# EAGLE board M_3x4._v4.2 (EAGLE 9.6.2)
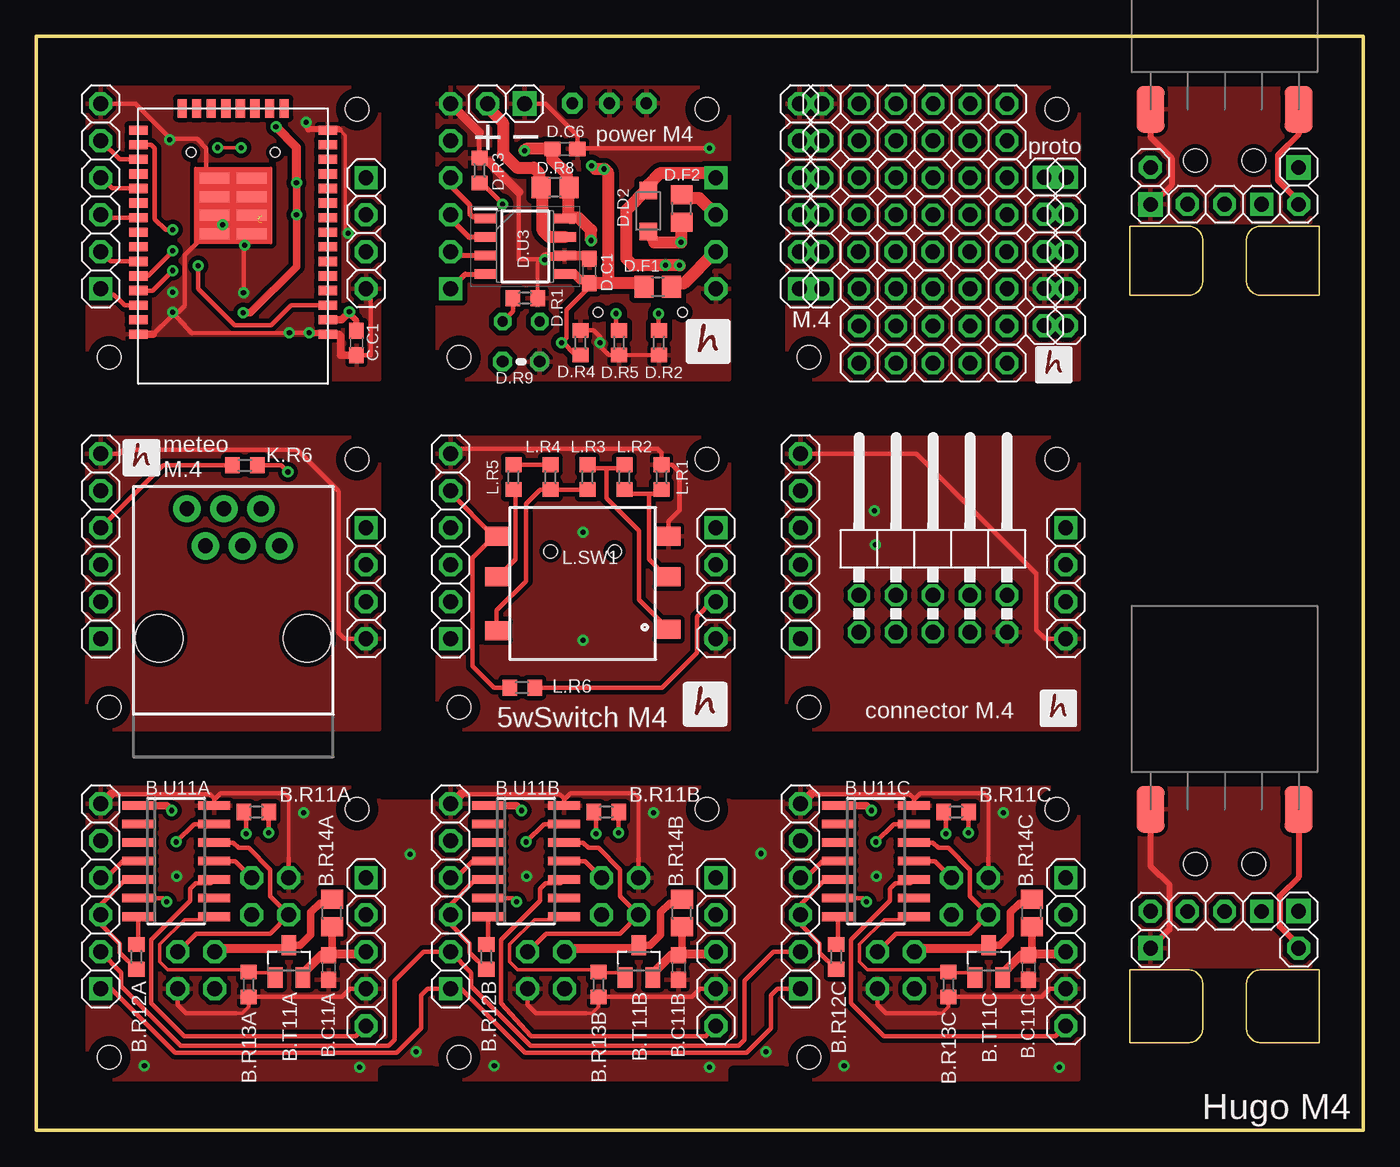
[diagram p0: board, top side]
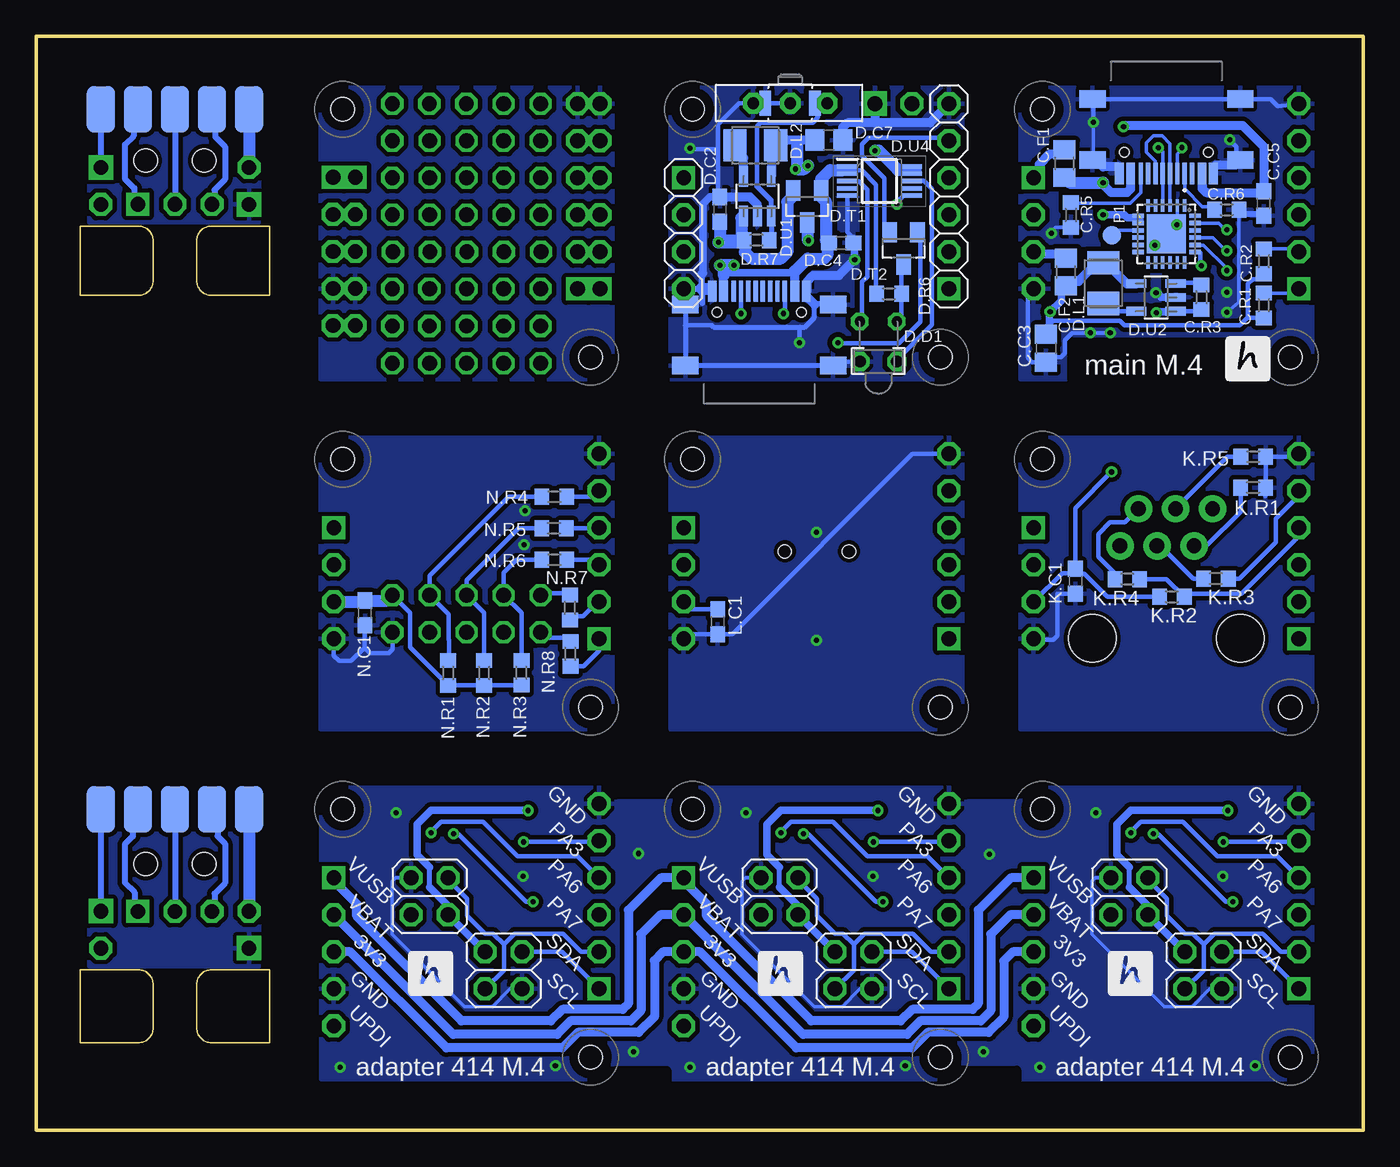
[diagram p1: board, bottom side, seen from below]

Size 91 x 75 mm. Coordinates in mm from the lower left corner, seen from the top.
Outline: 0,0 91,0 91,75 0,75 0,0
Copper layers (1*16): Top 0.035mm / dielectric 1.5mm / Bottom 0.035mm
Design rules "default *": minimum track width 10mil, minimum drill 0.35mm, track to track 6mil, track to pad 6mil, pad to pad 6mil, via to via 6mil, smd to smd 6mil, copper to edge 0mil, drill to drill 15mil, minimum pad ring 10mil, minimum via ring 8mil, stop-mask expansion 4mil, vias tented up to drill 0mil, thermal gap 10mil
Holes 1.6 mm at 29,53 46,70 70,70 53,53 22,46 5,29 5,5 22,22 29,5 46,22 53,5 70,22 29,29 46,46 79.5,66.5 83.5,66.5 70,46 53,29 79.5,18.25 83.5,18.25 5,53 22,70
tRestrict: area 45,69 to 47,71; area 28,52 to 30,54; area 69,69 to 71,71; area 52,52 to 54,54; area 21,45 to 23,47; area 4,28 to 6,30; area 21,21 to 23,23; area 4,4 to 6,6; area 45,21 to 47,23; area 28,4 to 30,6; area 69,21 to 71,23; area 52,4 to 54,6; 10 more areas
bRestrict: area 28,52 to 30,54; area 45,69 to 47,71; area 52,52 to 54,54; area 69,69 to 71,71; area 4,28 to 6,30; area 21,45 to 23,47; area 21,21 to 23,23; area 4,4 to 6,6; area 45,21 to 47,23; area 28,4 to 30,6; area 69,21 to 71,23; area 52,4 to 54,6; 10 more areas
Milling: 24 lines

## Footprints (pad centres in the part's own frame; a part is rotated, then mirrored left to right if it is on the bottom)
C0603 = smd 1.1 x 1: 1 -0.85,0; 2 0.85,0
1X06 = drill 1.016 pad 1.575 square: 1 -6.35,0 | drill 1.016 pad 1.575 octagon: 2 -3.81,0; 3 -1.27,0; 4 1.27,0; 5 3.81,0; 6 6.35,0
2X02 = drill 1.016 pad 1.575 octagon: 1 -1.27,-1.27; 2 -1.27,1.27; 3 1.27,-1.27; 4 1.27,1.27
1X05 = drill 1.016 pad 1.575 square: 1 -5.08,0 | drill 1.016 pad 1.575 octagon: 2 -2.54,0; 3 0,0; 4 2.54,0; 5 5.08,0
R0603 = smd 1 x 1.1: 1 -0.85,0; 2 0.85,0
FUSE = smd 1.3 x 1.5: 1 -0.95,0; 2 0.95,0
SO23 = smd 1 x 1.4: D 0,1.1; G -0.95,-1.1; S 0.95,-1.1
SO14 = smd 0.6 x 2.2: 1 -3.81,-2.6; 2 -2.54,-2.6; 3 -1.27,-2.6; 4 0,-2.6; 5 1.27,-2.6; 6 2.54,-2.6; 7 3.81,-2.6; 8 3.81,2.6; 9 2.54,2.6; 10 1.27,2.6; 11 0,2.6; 12 -1.27,2.6; 13 -2.54,2.6; 14 -3.81,2.6
C0805 = smd 1.3 x 1.5: 1 -0.95,0; 2 0.95,0
R0805 = smd 1.3 x 1.5: 1 -0.95,0; 2 0.95,0
TTGO-MICRO-32 = smd 1.27 x 0.635: 3V3 -6.5,5; EN -6.5,4; GND1 -6.5,6; GND2 -6.5,-8; GND3 6.5,6; IO0 6.5,-7; IO2 6.5,-8; IO4 6.5,-6; IO5 6.5,-3; IO12 -6.5,-7; IO14 -6.5,-6; IO16 6.5,-5; IO17 6.5,-4; IO18 6.5,-2; IO19 6.5,-1; IO21 6.5,1; IO22 6.5,4; IO23 6.5,5; IO25 -6.5,-3; IO26 -6.5,-4; IO27 -6.5,-5; IO32 -6.5,-1; IO33 -6.5,-2; IO34 -6.5,1; IO35 -6.5,0; NC 6.5,0; RXD0 6.5,2; TXD0 6.5,3; VN -6.5,2; VP -6.5,3 | smd 0.635 x 1.27: CLK 0.5,-9.5; CMD -0.5,-9.5; IO13 -3.5,-9.5; IO15 3.5,-9.5; SD0 1.5,-9.5; SD1 2.5,-9.5; SD2 -2.5,-9.5; SD3 -1.5,-9.5 | smd 2.032 x 0.762: GND4 -1.27,-0.889; GND5 1.27,-0.889; GND6 -1.27,-2.159; GND7 1.27,-2.159; GND8 -1.27,-3.429; GND9 -1.27,-4.699; GND10 1.27,-3.429; GND11 1.27,-4.699
LED_1.8 = drill 0.7 octagon: 1 -1.27,-0.4; 2 1.27,-0.4
SHOTKY_2.8 = smd 1.2 x 1.2: A -1.4,0; K 1.4,0
1X04 = drill 1.016 pad 1.575 square: 1 -3.81,0 | drill 1.016 pad 1.575 octagon: 2 -1.27,0; 3 1.27,0; 4 3.81,0
L3230M = smd 1.6 x 2.2: 1 -1.4,0; 2 1.4,0
1X02 = drill 1.016 pad 1.676 square: 1 -1.27,0 | drill 1.016 pad 1.575 octagon: 2 1.27,0
SWITCH = drill 0.8 pad 1.422 octagon: P$1 -2.54,0; P$2 0,0; P$3 2.54,0 | smd 0.8 x 1.7: P$4 -1.7,0; P$5 1.7,0
THERM = drill 0.813 octagon: 1 -1.27,0; 2 1.27,0
SOT32-5 = smd 0.6 x 1.4: BP 0.95,1.35; GND 0,-1.35; SHDN 0.95,-1.35; VIN -0.95,-1.35; VOUT -0.95,1.35
SOIC127P600X175-8N = smd 1.528 x 0.65: 1 -2.711,1.905; 2 -2.711,0.635; 3 -2.711,-0.635; 4 -2.711,-1.905; 5 2.711,-1.905; 6 2.711,-0.635; 7 2.711,0.635; 8 2.711,1.905
SOP50P490X110-10N = smd 1.4 x 0.3: 1 -2.2,1; 2 -2.2,0.5; 3 -2.2,0; 4 -2.2,-0.5; 5 -2.2,-1; 6 2.2,-1; 7 2.2,-0.5; 8 2.2,0; 9 2.2,0.5; 10 2.2,1
RJ11-6 = drill 1.016 pad 1.88: 1 -3.175,8.89; 2 -1.905,6.35; 3 -0.635,8.89; 4 0.635,6.35; 5 1.905,8.89; 6 3.175,6.35 | hole 3.251: -5.08,0; 5.08,0
1X03 = drill 1.016 pad 1.575 square: 1 -2.54,0 | drill 1.016 pad 1.575 octagon: 2 0,0; 3 2.54,0
2X05/90 = drill 1.016 octagon: 1 -5.08,-6.35; 2 -5.08,-3.81; 3 -2.54,-6.35; 4 -2.54,-3.81; 5 0,-6.35; 6 0,-3.81; 7 2.54,-6.35; 8 2.54,-3.81; 9 5.08,-6.35; 10 5.08,-3.81
5_WAY_SWITCH = smd 1.6 x 1.3: 1 -6,3; 2 -6,0.2; 3 -6,-3.5; 4 5.8,3; 5 5.8,0.2; 6 5.8,-3.4 | hole 0.9: 2.1,1.95; -2.3,1.95
B1,27 = smd 1.27 x 1.27: TP 0,0
QFN50P400X400X80-25N = smd 0.81 x 0.26: 1 -1.955,1.25; 2 -1.955,0.75; 3 -1.955,0.25; 4 -1.955,-0.25; 5 -1.955,-0.75; 6 -1.955,-1.25; 13 1.955,-1.25; 14 1.955,-0.75; 15 1.955,-0.25; 16 1.955,0.25; 17 1.955,0.75; 18 1.955,1.25 | smd 0.26 x 0.81: 7 -1.25,-1.955; 8 -0.75,-1.955; 9 -0.25,-1.955; 10 0.25,-1.955; 11 0.75,-1.955; 12 1.25,-1.955; 19 1.25,1.955; 20 0.75,1.955; 21 0.25,1.955; 22 -0.25,1.955; 23 -0.75,1.955; 24 -1.25,1.955 | smd 2.68 x 2.68: 25 0,0
USB-C = smd 0.6 x 1.45: A1B12 -3.235,3.825; A4B9 -2.46,3.825; B1A12 3.215,3.825; B4A9 2.44,3.825 | smd 0.3 x 1.45: A5 -1.26,3.825; A6 -0.26,3.825; A7 0.24,3.825; A8 1.24,3.825; B5 1.74,3.825; B6 0.74,3.825; B7 -0.76,3.825; B8 -1.76,3.825 | smd 1.8 x 1.2: SH1 -5.08,2.91; SH2 -5.08,-1.27; SH3 5.06,-1.27; SH4 5.06,2.91 | hole 0.65: 2.88,2.38; -2.9,2.38
1X5_AUTO = drill 1.016 octagon: 1 -5.08,0; 2 -2.54,0; 3 0,0; 4 2.54,0; 5 5.08,0
7PIN_CONNECTOR = smd 3.175 x 1.905: 1 0,5.08; 7 0,-5.08 | smd 3.175 x 1.905 bottom: 2 0,5.08; 3 0,2.54; 4 0,0; 5 0,-2.54; 6 0,-5.08

## Placement (x,y rotation side)
B.C11A  100n  [C0603]  20.04,11.15 270 top
B.C11B  100n  [C0603]  44.04,11.15 270 top
B.C11C  100n  [C0603]  68.04,11.15 270 top
B.J1  [1X06]  28.4,16.04 90 top
B.J2  [2X02]  34.96,10.96 270 bottom
B.J3  [2X02]  40.04,16.04 270 bottom
B.J4  [1X05]  46.6,12.23 270 top
B.J5  [1X06]  52.4,16.04 90 top
B.J6  [2X02]  58.96,10.96 270 bottom
B.J7  [2X02]  64.04,16.04 270 bottom
B.J8  [1X05]  70.6,12.23 270 top
B.J11  [1X05]  22.6,12.23 270 top
B.J12  [1X06]  4.4,16.04 90 top
B.J13  [2X02]  10.96,10.96 270 bottom
B.J14  [2X02]  16.04,16.04 270 bottom
B.R11A  alt RX 0R  [R0603]  15.09,21.82 180 top
B.R11B  alt RX 0R  [R0603]  39.09,21.82 180 top
B.R11C  alt RX 0R  [R0603]  63.09,21.82 180 top
B.R12A  alt TX 0R  [R0603]  6.86,11.89 90 top
B.R12B  alt TX 0R  [R0603]  30.86,11.89 90 top
B.R12C  alt TX 0R  [R0603]  54.86,11.89 90 top
B.R13A  100k  [R0603]  14.56,9.98 270 top
B.R13B  100k  [R0603]  38.56,9.98 270 top
B.R13C  100k  [R0603]  62.56,9.98 270 top
B.R14A  alt fuse or 0R  [FUSE]  20.27,14.9 90 top
B.R14B  alt fuse or 0R  [FUSE]  44.27,14.9 90 top
B.R14C  alt fuse or 0R  [FUSE]  68.27,14.9 90 top
B.T11A  NX3008  [SO23]  17.33,11.59 0 top
B.T11B  NX3008  [SO23]  41.33,11.59 0 top
B.T11C  NX3008  [SO23]  65.33,11.59 0 top
B.U11A  AT414  [SO14]  9.59,18.45 270 top
B.U11B  AT414  [SO14]  33.59,18.45 270 top
B.U11C  AT414  [SO14]  57.59,18.45 270 top
C.C1  100n  [C0603]  21.96,53.98 270 top
C.C3  22u  [C0805]  21.75,53.62 270 bottom
C.C5  1u  [C0603]  6.81,63.55 90 bottom
C.F1  0.5A  [R0805]  20.48,66.28 90 bottom
C.F2  0.5A  [R0805]  20.38,58.85 90 bottom
C.J2  [1X06]  4.4,64.04 90 top
C.R1  2k2  [R0603]  6.81,56.56 270 bottom
C.R2  2k2  [R0603]  6.81,59.58 270 bottom
C.R3  100k  [R0603]  11.08,57.12 270 bottom
C.R5  5K1  [R0603]  20.03,62.76 90 bottom
C.R6  5k1  [R0603]  9.35,63.11 180 bottom
C.U1  TTGO-MICRO-32  [TTGO-MICRO-32]  13.49,60.58 180 top
D.C1  100n  [C0603]  37.92,58.92 270 top
D.C2  4u7  [C0603]  44.12,63.14 270 bottom
D.C4  4u7  [C0603]  35.8,60.85 180 bottom
D.C6  4u7  [C0603]  36.25,67.29 180 top
D.C7  10u  [C0805]  36.64,67.9 180 bottom
D.D1  LED_1.8_FLIPPED  [LED_1.8]  33.25,55.05 180 bottom
D.D2  SHOTKY_2.8  [SHOTKY_2.8]  41.96,63.04 270 top
D.F1  0.5A  [R0805]  42.61,57.85 0 top
D.F2  1.1A  [R0805]  44.26,63.2 90 top
D.J2  [1X06]  28.4,64.04 90 bottom
D.J3  [1X04]  46.6,61.5 270 bottom
D.L1  2u2  [L3230M]  17.83,58.09 90 bottom
D.L2  2u2  [L3230M]  41.68,67.54 0 bottom
D.LIPOL  [1X02]  32.21,70.39 180 top
D.ON/OFF/RESET  SWITCH  [SWITCH]  39.3,70.42 0 bottom
D.R1  4k7  [R0603]  33.53,57.05 180 top
D.R2  5k1  [R0603]  42.7,54 270 top
D.R3  I=1/R (4k7 for 213mA, 2k2 for455mA )  [R0603]  30.4,65.81 270 top
D.R4  100k  [R0603]  37.31,54 90 top
D.R5  5k1  [R0603]  39.96,54 270 top
D.R6  3k3  [R0603]  32.51,57.35 180 bottom
D.R7  390k  [R0603]  41.6,61.03 0 bottom
D.R8  0.1  [R0805]  35.58,64.64 180 top
D.R9  TERM_10K  [THERM]  33.25,52.71 180 top
D.T1  FDV304  [SO23]  38.13,63.34 180 bottom
D.T2  NX3008  [SO23]  31.52,60.47 180 bottom
D.U1  LM3671_3.3  [SOT32-5]  41.54,64.05 0 bottom
D.U2  LM3671_3.3  [SOT32-5]  14.2,57.11 90 bottom
D.U3  INA219AIDR  [SOIC127P600X175-8N]  33.53,60.6 0 top
D.U4  MCP73833-AMI_UN  [SOP50P490X110-10N]  33.17,65.09 0 bottom
G.J1  [1X06]  28.4,40.04 90 top
G.J2  [1X04]  46.6,37.5 270 top
I.J1  [1X04]  70.6,37.5 270 top
I.J3  [1X04]  22.6,37.5 270 top
J1  RJ11  [RJ11-6]  13.5,33.72 0 top
JP1  [1X04]  22.6,61.5 270 top
JP2  [1X06]  52.35,64.04 90 top
JP3  [1X06]  53.87,64.04 90 top
JP4  [1X05]  69.13,60.26 270 top
JP5  [1X06]  4.4,40.04 90 top
JP6  [1X03]  81.5,63.5 180 top
JP7  [1X02]  76.42,64.75 90 top
JP8  [1X02]  86.58,64.75 270 top
JP9  [1X06]  52.4,40.04 90 top
JP10  [2X05/90]  61.5,40.5 0 top
JP11  [1X05]  70.65,60.26 270 top
JP12  [1X03]  81.5,15 180 top
JP13  [1X02]  76.42,13.75 90 top
JP14  [1X02]  86.58,13.75 270 top
K.C1  100n  [C0603]  19.74,37.64 270 bottom
K.R1  1k  [R0603]  7.55,44.07 180 bottom
K.R2  4k7  [R0603]  13.11,36.58 0 bottom
K.R3  1k  [R0603]  10.1,37.82 180 bottom
K.R4  1k  [R0603]  16.17,37.8 180 bottom
K.R5  1k  [R0603]  7.54,46.18 180 bottom
K.R6  4k7  [R0603]  14.3,45.59 180 top
L.C1  100n  [C0603]  44.27,34.87 90 bottom
L.R1  1k  [R0603]  42.88,44.78 90 top
L.R2  1k  [R0603]  40.34,44.78 270 top
L.R3  2k2  [R0603]  37.8,44.78 90 top
L.R4  2k2  [R0603]  35.26,44.78 270 top
L.R5  2k2  [R0603]  32.72,44.78 270 top
L.R6  2k2  [R0603]  33.32,30.35 0 top
L.SW1  5_WAY_SWITCH  [5_WAY_SWITCH]  37.57,37.74 0 top
N.C1  100n  [C0603]  68.46,35.47 270 bottom
N.R1  4k7  [R0603]  62.76,31.35 90 bottom
N.R2  4k7  [R0603]  60.29,31.35 90 bottom
N.R3  4k7  [R0603]  57.74,31.37 90 bottom
N.R4  4k7  [R0603]  55.47,43.43 180 bottom
N.R5  4k7  [R0603]  55.5,41.27 180 bottom
N.R6  4k7  [R0603]  55.47,39.12 180 bottom
N.R7  4k7  [R0603]  54.4,35.84 90 bottom
N.R8  4k7  [R0603]  54.38,32.66 90 bottom
P1  TPB1,27  [B1,27]  17.24,61.37 0 bottom
U1  CP2104-F03-GM  [QFN50P400X400X80-25N]  13.49,61.46 270 bottom
U$1  USB-C  [USB-C]  13.5,69.43 180 bottom
U$2  USB-C  [USB-C]  41.41,53.7 0 bottom
U$3  PINHD-1X5_AUTO  [1X5_AUTO]  61.51,70.39 0 top
U$4  PINHD-1X5_AUTO  [1X5_AUTO]  61.5,67.85 0 top
U$5  PINHD-1X5_AUTO  [1X5_AUTO]  61.5,65.31 0 top
U$6  PINHD-1X5_AUTO  [1X5_AUTO]  61.5,62.77 0 top
U$7  PINHD-1X5_AUTO  [1X5_AUTO]  61.47,60.23 0 top
U$8  PINHD-1X5_AUTO  [1X5_AUTO]  61.5,57.69 0 top
U$9  PINHD-1X5_AUTO  [1X5_AUTO]  61.5,55.14 0 top
U$10  PINHD-1X5_AUTO  [1X5_AUTO]  61.5,52.6 0 top
U$11  7PIN_CONNECTOR  [7PIN_CONNECTOR]  81.5,70 270 top
U$12  7PIN_CONNECTOR  [7PIN_CONNECTOR]  81.5,22 270 top

## Library data of the parts
B.C11A B.C11B B.C11C C.C1 C.C3 C.C5 D.C1 D.C2 D.C4 D.C6 D.C7 K.C1 L.C1 N.C1 = rcl; SPICEPREFIX: C
B.J1-B.J8 B.J11-B.J14 C.J2 D.J2 D.J3 D.LIPOL G.J1 G.J2 I.J1 I.J3 JP1-JP14 U$3-U$10 = pinhead2
B.R11A B.R11B B.R11C B.R12A B.R12B B.R12C B.R13A B.R13B B.R13C C.F1 C.F2 C.R1-C.R3 C.R5 C.R6 D.F1 D.F2 D.R1-D.R8 K.R1-K.R6 L.R1-L.R6 N.R1-N.R8 = rcl; SPICEPREFIX: R
B.R14A B.R14B B.R14C B.T11A B.T11B B.T11C C.U1 D.D1 D.D2 D.ON/OFF/RESET D.R9 D.T1 D.T2 L.SW1 U$1 U$2 U$11 U$12 = hugo
B.U11A B.U11B B.U11C = atmel
D.L1 D.L2 = rcl; SPICEPREFIX: L
D.U1 D.U2 = !stavebnice03
D.U3 = SamacSys_Parts; DESCRIPTION: 26-V, Bidirectional, Zero-Drift, High-Side, I2C Out Current/Power Monitor; HEIGHT: 1.75mm; MANUFACTURER_NAME: Texas Instruments; MANUFACTURER_PART_NUMBER: INA219AIDR; MOUSER_PART_NUMBER: 595-INA219AIDR; MOUSER_PRICE-STOCK: https://www.mouser.co.uk/ProductDetail/Texas-Instruments/INA219AIDR?qs=XGzIaZb%2FFYIE5YcOHTnKDA%3D%3D
D.U4 = SamacSys_Parts; DESCRIPTION: Microchip MCP73833-AMI/UN, Battery Charge Controller Lithium-Ion, Lithium-Polymer, 10-Pin MSOP; HEIGHT: 1.1mm; MANUFACTURER_NAME: Microchip; MANUFACTURER_PART_NUMBER: MCP73833-AMI/UN; MOUSER_PART_NUMBER: 579-MCP73833-AMI/UN; MOUSER_PRICE-STOCK: https://www.mouser.co.uk/ProductDetail/Microchip-Technology/MCP73833-AMI-UN?qs=Fxu3fLyJv8fd%2FGnsUSC9lg%3D%3D
J1 = SparkFun-Connectors; PROD_ID: CONN-08590; SF_ID: PRT-00132
P1 = testpad
U1 = CP2104; AVAILABILITY: Unavailable; DESCRIPTION: USB Bridge, USB to UART USB 2.0 UART Interface 24-QFN (4x4); MF: Silicon Labs; MP: CP2104; PACKAGE: QFN-24 Silicon Labs; PRICE: None

## Nets
3V3F: D.F1.2 D.J3.3
GND: C.C1.2 C.C3.2 C.C5.1 C.J2.6 C.R5.1 C.R6.1 C.U1.GND1 C.U1.GND2 C.U1.GND3 C.U1.GND4 C.U1.GND5 C.U1.GND6 C.U1.GND7 C.U1.GND8 C.U1.GND9 C.U1.GND10 C.U1.GND11 D.U2.GND JP1.4 U1.2 U1.25 U$1.A1B12 U$1.B1A12 U$1.SH1 U$1.SH2 U$1.SH3 U$1.SH4
GND1: D.C1.1 D.C2.1 D.C4.1 D.C6.1 D.C7.1 D.J2.6 D.J3.4 D.LIPOL.1 D.ON/OFF/RESET.P$1 D.ON/OFF/RESET.P$2 D.ON/OFF/RESET.P$4 D.R1.1 D.R2.2 D.R3.1 D.R4.2 D.R5.2 D.R9.1 D.U1.GND D.U3.6 D.U4.5 U$2.A1B12 U$2.B1A12 U$2.SH1 U$2.SH2 U$2.SH3 U$2.SH4
GND2: JP2.6 JP3.6 JP4.4 JP11.4
GND3: G.J1.6 G.J2.4 L.C1.1 L.R1.2 L.SW1.4
GND4: I.J3.4 JP5.6 K.C1.2 K.R1.1 K.R5.1
GND5: JP7.1 U$11.7
GND6: B.C11A.2 B.C11B.2 B.C11C.2 B.J1.6 B.J2.4 B.J3.1 B.J4.4 B.J5.6 B.J6.4 B.J7.1 B.J8.4 B.J11.4 B.J12.6 B.J13.4 B.J14.1 B.R13A.2 B.R13B.2 B.R13C.2 B.U11A.14 B.U11B.14 B.U11C.14
GND7: I.J1.4 JP9.6 JP10.9 N.C1.2
GND8: JP13.1 U$12.7
IN+: D.LIPOL.2 D.R8.2 D.U3.7
IN-: D.C6.2 D.R8.1 D.T1.D D.U3.8 D.U4.9 D.U4.10
N$1: U1.4 U$1.A7 U$1.B7
N$2: U1.3 U$1.A6 U$1.B6
N$3: C.R6.2 U$1.A5
N$4: C.R5.2 U$1.B5
N$5: C.F2.2 JP1.3
N$6: C.F1.2 JP1.1
N$7: P1.TP U1.9
N$8: U1.5 U1.6
N$9: D.L2.1 D.U1.VOUT
N$10: D.L1.1 D.U2.VOUT
N$11: C.R3.1 D.U2.SHDN
N$12: C.J2.5 C.U1.IO4
N$13: C.J2.4 C.U1.IO17
N$14: C.J2.3 C.U1.IO18
N$15: D.ON/OFF/RESET.P$3 D.ON/OFF/RESET.P$5 D.R7.2 D.U1.SHDN
N$16: D.R5.1 U$2.B5
N$17: D.R2.1 U$2.A5
N$18: D.R3.2 D.U4.6
N$19: D.R9.2 D.U4.8
N$20: D.J2.5 D.T2.S
N$21: JP2.5 JP3.5
N$22: JP2.4 JP3.4
N$24: JP2.3 JP3.3
N$25: JP2.2 JP3.2
N$27: JP2.1 JP3.1
N$28: JP4.5 JP11.5
N$29: JP4.2 JP11.2
N$30: JP4.1 JP11.1
N$31: JP4.3 JP11.3
N$32: L.R1.1 L.R2.2 L.SW1.5
N$33: L.R2.1 L.R3.2 L.SW1.6
N$34: L.R3.1 L.R4.2 L.SW1.3
N$35: L.R5.2 L.SW1.2
N$36: G.J1.5 L.R6.1 L.SW1.1
N$37: L.R4.1 L.R5.1
N$38: JP5.5 K.R3.1
N$39: JP5.4 K.R2.2 K.R4.1 K.R6.2
N$40: J1.5 K.R4.2
N$41: J1.4 K.R3.2
N$42: J1.3 K.R5.2
N$43: J1.2 K.R1.2
N$44: B.R12A.2 B.U11A.7
N$45: B.R11A.2 B.U11A.6
N$46: B.R13A.1 B.T11A.G B.U11A.8
N$47: B.R12C.2 B.U11C.7
N$48: B.C11A.1 B.C11B.1 B.C11C.1 B.J4.3 B.J8.3 B.J11.3 B.R14A.1 B.R14B.1 B.R14C.1 B.T11A.S B.T11B.S B.T11C.S
N$49: B.R12B.2 B.U11B.7
N$50: B.R11B.2 B.U11B.6
N$51: B.R13B.1 B.T11B.G B.U11B.8
N$52: B.R11C.2 B.U11C.6
N$53: B.R13C.1 B.T11C.G B.U11C.8
N$54: JP8.1 U$11.2
N$55: JP8.2 U$11.1
N$56: JP6.2 U$11.4
N$57: JP6.3 U$11.5
N$58: JP6.1 U$11.3
N$59: JP10.8 N.R1.2 N.R4.2
N$60: JP10.6 N.R2.2 N.R5.2
N$61: JP10.2 N.R7.2
N$62: JP9.5 N.R4.1
N$63: JP9.4 N.R5.1
N$64: JP9.3 N.R6.1
N$65: JP9.2 N.R7.1
N$66: JP9.1 N.R8.1
N$67: JP10.1 N.R8.2
N$68: JP10.4 N.R3.2 N.R6.2
N$69: JP14.1 U$12.2
N$70: JP14.2 U$12.1
N$71: JP12.2 U$12.4
N$72: JP12.3 U$12.5
N$73: JP12.1 U$12.3
PA1: B.J12.5 B.U11A.13
PA2: B.J12.4 B.R11A.1 B.U11A.4
PA3: D.D1.1 D.R1.2 D.R6.1 D.T2.D
PA4: B.J12.3 B.R12A.1 B.U11A.5
PA5: B.J1.5 B.U11B.13
PA6: D.J2.4 D.U3.1
PA7: D.J2.3 D.U3.2
PA8: B.J1.4 B.R11B.1 B.U11B.4
PA9: B.J1.3 B.R12B.1 B.U11B.5
PA10: B.J5.5 B.U11C.13
PA11: B.J5.4 B.R11C.1 B.U11C.4
PA12: B.J5.3 B.R12C.1 B.U11C.5
PROG: C.U1.IO0 U1.23
RESET: C.U1.EN U1.19
RX: C.U1.TXD0 U1.20
SCL: C.J2.1 C.R1.1 C.U1.IO22
SCL1: D.J2.1 D.U3.4
SCL2: B.J1.1 B.J2.2 B.J3.3 B.J5.1 B.J6.2 B.J7.3 B.J12.1 B.J13.2 B.J14.3 B.U11A.12 B.U11B.12 B.U11C.12
SDA: C.J2.2 C.R2.1 C.U1.IO21
SDA1: D.J2.2 D.U3.3
SDA2: B.J1.2 B.J2.3 B.J3.2 B.J5.2 B.J6.3 B.J7.2 B.J12.2 B.J13.3 B.J14.2 B.U11A.11 B.U11B.11 B.U11C.11
STAT1: D.D1.2 D.U4.3
TX: C.U1.RXD0 U1.21
UPDI: B.J11.5 B.U11A.10
UPDI1: B.J4.5 B.U11B.10
UPDI2: B.J8.5 B.U11C.10
VBAT: B.J4.2 B.J8.2 B.J11.2
VBATF: D.F2.2 D.J3.2
VCC: C.C1.1 C.C3.1 C.F2.1 C.R1.2 C.R2.2 C.U1.3V3 D.L1.2 D.U2.BP
VCC1: D.C1.2 D.C7.2 D.F1.1 D.L2.2 D.R4.1 D.T2.G D.U1.BP D.U3.5
VCC2: G.J2.3 L.C1.2 L.R6.2
VCC3: I.J3.3 K.C1.1 K.R2.1 K.R6.1
VCC4: B.J13.1 B.J14.4 B.R14A.2 B.T11A.D B.U11A.1
VCC5: B.J2.1 B.J3.4 B.R14B.2 B.T11B.D B.U11B.1
VCC6: B.J6.1 B.J7.4 B.R14C.2 B.T11C.D B.U11C.1
VCC7: JP7.2 U$11.6
VCC8: I.J1.3 JP10.10 N.C1.1 N.R1.1 N.R2.1 N.R3.1
VCC9: JP13.2 U$12.6
VMOT: D.C2.2 D.D2.K D.F2.1 D.R7.1 D.T1.S D.U1.VIN
VUSB: C.C5.2 C.F1.1 C.R3.2 D.U2.VIN U1.7 U1.8 U$1.A4B9 U$1.B4A9
VUSB1: D.C4.2 D.D2.A D.J3.1 D.R6.2 D.T1.G D.U4.1 D.U4.2 U$2.A4B9 U$2.B4A9
VUSB2: B.J4.1 B.J8.1 B.J11.1

## Tracks (layer width: path | path; a pad name or v marks a point on that pad's centre or on a via)
3V3F
  Top 0.813: D.F1.2 43.77,58.05 44.37,58.05 46.55,60.23 D.J3.3
GND  (via drill 0.35)
  Top 0.254: 20.79,68.63 21.17,68.24 21.17,61.78 21.37,61.59 v21.37,61.52 | 12.17,61.21 12.42,61.47 12.8,61.84 13.47,61.84 14.1,61.21 | v14.2,57.43
  Top 0.305: 18.65,68.63 18.51,68.77 v18.51,69.12 18.51,68.97 | 19.94,68.63 C.U1.GND2 | v9.35,56.09 9.27,55.82 8.02,54.57 | C.U1.GND3 | 9.23,68 v9.14,67.91 | v9.14,67.91 9.14,68.04 6.8,70.38 6.61,70.39 C.J2.6 | 21.96,53.15 C.C1.2 22.91,53.13 22.91,57.38 JP1.4 | C.U1.GND1 19.88,54.46 19.85,54.46 19.75,54.57 20.18,54.55 | v9.35,56.09 10.65,54.66 v17.35,54.68 17.36,54.67 17.5,54.68 v18.71,54.68 | v9.14,67.91 9.21,67.97 11.01,67.97 11.65,67.33 11.65,65.79 12.73,64.71 12.73,63.76 12.73,62.57 | 12.73,62.57 12.73,62.43 12.73,61.13 14.2,62.6 v14.2,57.43 | 15.32,61.26 14.15,61.26 14.1,61.21 12.17,61.21 | 12.42,61.47 C.U1.GND5 | v14.2,57.43 14.05,57.62 | 12.73,62.57 10.17,60.01 10.17,56.52 9.73,56.09 v9.35,56.09
  Top 0.406: 18.65,68.63 19.94,68.63 20.79,68.63 | 20.18,54.55 19.39,54.68 v18.71,54.68
  Top 0.508: 8.02,54.57 C.U1.GND3 | C.C1.2 20.86,53.13 20.86,54.48 20.76,54.58 C.U1.GND1 19.95,54.61 | C.U1.GND10 12.48,64 12.73,63.76 | C.U1.GND7 12.42,62.73 12.73,62.43
  Bottom 0.254: v9.35,56.09 8.52,56.79 8.52,63.03 C.R6.1 8.35,62.86 | v18.51,69.12 18.51,66.57 U$1.SH4 | v21.37,61.52 21.37,61.63 21.09,61.91 C.R5.1 | D.U2.GND 12.88,57.14 | U1.2 12.75,62.4 12.77,62.38 v12.77,62.1 12.86,62.1 U1.25 | C.C5.1 7.07,62.86
  Bottom 0.305: C.C3.2 21.68,52.67 | 18.5,69.12 v18.51,69.12 | U$1.A1B12 10.27,66.01 10.24,66.01 | 10.09,66.18 10.09,66.01 10.24,66.01 | 10.24,66.01 10.24,65.83 | v9.14,67.91 8.68,67.44 8.68,66.4 | v18.51,69.12 18.51,70.65 U$1.SH3 U$1.SH2 6.34,70.7 5.83,70.2 C.J2.6 | C.C3.2 21.43,52.99 20.72,52.99 20.45,53.26 20.45,54.18 19.96,54.66 v17.35,54.68 | 18.32,66.52 U$1.SH4 18.29,66.52 17.84,66.06 | U$1.SH1 8.76,66.18 | 13.7,61.66 U1.25 | 12.71,62.46 13.46,61.71 | JP1.4 23,57.29 23,52.96 22.71,52.67 C.C3.2 | 18.56,69.07 v18.51,69.12 | C.C5.1 6.72,62.7 6.65,62.63 | U$1.B1A12 16.71,66.05 16.73,66.06
  Bottom 0.406: 8.35,62.86 7.07,62.86
  Bottom 0.508: D.U2.GND 12.87,57.12 13.87,57.12 14.06,57.43 v14.2,57.43 | U1.25 13.75,61.21 14.1,61.21
  Bottom 0.61: 16.73,66.06 17.84,66.06 | 8.76,66.18 10.09,66.18
  other vias: 14.28,60.68 9.35,57.47
  pour Top (isolate 0.305): 3.5,51.5 3.5,71.5 23.5,71.5 23.5,51.5
  pour Bottom (isolate 0.305): 3.5,71.5 23.5,71.5 23.5,51.5 3.5,51.5
GND1  (via drill 0.35)
  Top 0.254: D.R1.1 34.38,59.73 34.39,59.74
  Top 0.305: D.U3.6 36.23,59.95 | D.C1.1 38.16,60.01 | D.R2.2 42.7,53.17 D.R5.2 39.25,53.17 38.65,53.77 v38.65,54 38.65,54.4 38.21,54.85 D.R4.2 | D.LIPOL.1 34.91,70.39 37.1,68.2 D.C6.1 37.15,67.33 v46.18,67.33 | D.J2.6 | 30.37,68.42 30.37,66.69 D.R3.1 30.65,66.41 31.02,66.41 | 34.88,59.89 34.98,59.79 v34.87,59.68 34.82,59.74 34.39,59.74 33.08,59.74 33.08,64.35
  Top 0.61: D.C1.1 37.73,59.97 D.U3.6 36.16,59.89 34.88,59.89 | 30.37,68.42 D.J2.6 | 31.02,66.41 33.08,64.35
  Bottom 0.254: 33.15,68.97 33.03,69.08 | 35.46,64.09 D.U4.5 | D.C2.1 44.15,64.03 | 44.29,63.91 44.3,63.92
  Bottom 0.305: 44.68,55.2 46.49,55.2 46.49,55.19 | 44.27,67.28 44.27,68.97 42.81,70.42 D.ON/OFF/RESET.P$1 | 44.27,67.28 44.27,63.93 | 43.7,63.97 44.05,64.32 44.12,64.25 D.C2.1 44.23,63.99 44.3,63.92 | 33.75,70.66 D.LIPOL.1 | 38.65,54.13 v38.65,54 | v38.65,54 38.63,53.97 | D.ON/OFF/RESET.P$1 D.ON/OFF/RESET.P$2 | D.ON/OFF/RESET.P$4 D.ON/OFF/RESET.P$1 | v46.18,67.33 46.13,67.28 44.27,67.28 | D.U4.5 35.38,61.57 34.95,61.15 | v38.65,54 38.65,55.07 | D.R9.1 36.07,52.71 U$2.SH3
  Bottom 0.356: 33.48,68.96 D.LIPOL.1 | U$2.SH3 U$2.SH2 46.49,55.19 U$2.SH1 | 38.2,57.2 U$2.B1A12 | 44.68,55.2 44.55,55.07 38.65,55.07 | 39.52,55.07 38.29,55.07 37.65,55.71 37.65,56.45 37.71,56.51 37.61,56.61 37.51,56.71 36.45,56.71 U$2.SH4
  Bottom 0.406: 45.51,57.85 45.37,57.98 45.37,58.71 | 45.51,57.85 45.66,57.69 | U$2.A1B12 44.82,57.7 44.84,57.69 | 45.66,57.69 D.J3.4 46.6,56.72 | 45.66,57.69 45.31,57.69 | 45.51,57.85 45.34,57.68 45.34,56.72
  Bottom 0.508: D.C4.1 34.95,61.15 | 34.95,61.15 D.C4.1 | 34.91,59.65 v34.87,59.68 34.87,60.92 D.C4.1 | 45.29,58.79 45.29,63.54 44.81,64.03 44.15,64.03
  Bottom 0.61: D.LIPOL.1 33.48,69.08 33.03,69.08 29.71,69.08 D.J2.6 | D.U1.GND 41.54,63.47 42.06,63.99 43.67,63.99 43.7,63.97 | 44.27,63.93 44.29,63.91 | 44.3,63.92 44.21,63.93 | 45.37,58.71 45.29,58.79 | 37.61,56.61 38.2,57.2 | 35.81,56.84 36.12,56.84 U$2.SH4 36.22,56.74 | 46.6,56.72 U$2.SH1 | D.C7.1 35.69,68.77 35.38,69.08 33.51,69.08 | v34.87,59.68 35.94,58.62 37.72,58.62 38.15,58.19 38.15,57.58 U$2.B1A12
  Bottom 0.813: 35.02,60.92 D.C4.1 | 45.31,57.69 44.84,57.69
  pour Top (isolate 0.356): 27.5,71.5 27.5,51.5 47.5,51.5 47.5,71.5
  pour Bottom (isolate 0.356, rank 3): 27.5,71.5 47.5,71.5 47.5,51.5 27.5,51.5
GND2
  pour Top (isolate 0.305): 51.5,71.5 71.5,71.5 71.5,51.5 51.5,51.5
  pour Bottom (isolate 0.305): 51.5,71.5 71.5,71.5 71.5,51.5 51.5,51.5
GND3  (via drill 0.35)
  Top 0.305: L.SW1.4 43.37,41.77 44.12,42.52 44.12,45.11 43.6,45.63 L.R1.2 42.88,46.46 42.6,46.74 28.75,46.74 G.J1.6
  Bottom 0.305: G.J2.4 46.27,34.02 L.C1.1 43.27,34.02 30.9,46.39 G.J1.6
  other vias: 37.5,41 37.5,33.6
  pour Top (isolate 0.305): 27.5,47.5 27.5,27.5 47.5,27.5 47.5,47.5
  pour Bottom (isolate 0.305): 27.5,47.5 27.5,27.5 47.5,27.5 47.5,47.5
GND4
  Top 0.305: I.J3.4 21.15,33.69 20.74,34.1 20.74,43.8 17.89,46.64 5.95,46.64 5.7,46.39 JP5.6
  Bottom 0.305: K.C1.2 20.95,36.79 20.95,33.92 21.25,33.62 22.53,33.62 I.J3.4 | JP5.6 4.61,46.18 K.R5.1 6.69,44.08 K.R1.1 6.7,43.47
  pour Top (isolate 0.305): 3.47,47.5 23.5,47.5 23.5,27.5 3.47,27.5
  pour Bottom (isolate 0.305): 3.5,47.5 23.5,47.5 23.5,27.5 3.5,27.5
GND5
  Top 0.406: U$11.7 76.42,68.11 77.87,66.66 77.87,64.83 76.52,63.48 JP7.1
  pour Top (isolate 0.305): 75.7,71.42 87.38,71.42 87.38,62.25 75.7,62.25
  pour Bottom (isolate 0.305): 75.72,71.42 87.38,71.42 87.38,62.25 75.72,62.25
GND6  (via drill 0.35)
  Top 0.254: 14.58,9.16 B.R13A.2 14.56,8.45 14.12,8.01 13.71,8.01 | 17.31,18.67 17.31,22.79 16.98,23.12 | 38.58,9.16 B.R13B.2 38.56,8.45 38.12,8.01 37.71,8.01 | 41.31,18.67 41.31,22.79 40.98,23.12 | 62.58,9.16 B.R13C.2 62.56,8.45 62.12,8.01 61.71,8.01 | 65.31,18.67 65.31,22.79 64.98,23.12
  Top 0.305: B.J12.6 4.48,22.39 | 5.14,23.05 11.89,23.05 12.19,22.75 B.U11A.14 12.19,22.67 12.63,23.12 16.98,23.12 | B.J14.1 17.31,18.67 | 13.71,8.01 10.27,8.01 9.69,8.59 B.J13.4 | B.J11.4 21.51,9.69 20.97,9.16 14.58,9.16 | B.J1.6 28.48,22.39 | 29.14,23.05 35.89,23.05 36.19,22.75 B.U11B.14 36.19,22.67 36.63,23.12 40.98,23.12 | B.J3.1 41.31,18.67 | 37.71,8.01 34.27,8.01 33.69,8.59 B.J2.4 | B.J4.4 45.51,9.69 44.97,9.16 38.58,9.16 | B.J5.6 52.48,22.39 | 53.14,23.05 59.89,23.05 60.19,22.75 B.U11C.14 60.19,22.67 60.63,23.12 64.98,23.12 | B.J7.1 65.31,18.67 | 61.71,8.01 58.27,8.01 57.69,8.59 B.J6.4 | B.J8.4 69.51,9.69 68.97,9.16 62.58,9.16
  Top 0.61: 4.48,22.39 5.14,23.05 | 28.48,22.39 29.14,23.05 | 52.48,22.39 53.14,23.05
  Bottom 0.254: B.J13.4 10.51,9.69 11.72,8.47 13.62,8.47 18.61,13.45 18.61,17.08 18.38,17.31 B.J14.1 | B.J2.4 34.51,9.69 35.73,8.47 37.62,8.47 42.6,13.45 42.6,17.08 42.38,17.31 B.J3.1 | B.J6.4 58.51,9.69 59.73,8.47 61.62,8.47 66.61,13.45 66.61,17.08 66.38,17.31 B.J7.1
  other vias: 7.41,4.42 9.63,17.4 22.18,4.32 18.34,21.77 31.41,4.42 33.63,17.4 46.18,4.32 42.34,21.77 55.41,4.42 57.63,17.4 70.18,4.32 66.34,21.77 26.04,5.39 50.04,5.39 25.63,18.92 49.71,18.98
  pour Bottom (isolate 0.305): 3.5,23.5 3.5,3.5 71.48,3.5 71.48,23.5
  pour Top (isolate 0.305): 3.5,23.5 3.5,3.5 71.48,3.5 71.48,23.5
GND7  (via drill 0.35)
  Top 0.305: JP9.6 60.36,46.39 68.59,38.16 68.59,34.29 69.19,33.69 I.J1.4
  Top 0.61: JP9.6 52.45,46.39
  Bottom 0.305: N.C1.2 68.5,34.59 68.5,33.1 | 68.5,33.1 68.12,32.72 66.85,32.72 66.58,32.98 JP10.9 | I.J1.4 70.6,32.53 70.25,32.18 69.42,32.18 68.5,33.1
  other vias: 57.48,42.47 57.55,40.16
  pour Top (isolate 0.305): 51.47,47.5 71.5,47.5 71.5,27.5 51.47,27.5
  pour Bottom (isolate 0.305): 51.5,47.5 71.5,47.5 71.5,27.5 51.5,27.5
GND8
  Top 0.406: U$12.7 76.42,18.11 77.72,16.81 77.72,13.78 JP13.1
  pour Top (isolate 0.305): 75.7,23.42 87.38,23.42 87.38,11.25 75.7,11.25
  pour Bottom (isolate 0.305): 75.72,23.42 87.38,23.42 87.38,11.25 75.72,11.25
IN+
  Top 0.305: 34.66,61.64 34.72,61.69
  Top 0.813: D.LIPOL.2 30.94,70.14 32,69.07 32,66.96 32.96,66.01 34.12,66.01 34.47,65.65 34.47,64.8 D.R8.2 34.72,64.55 34.72,61.69 35.18,61.24 D.U3.7
IN-  (via drill 0.35)
  Top 0.305: 37.34,62.43 37.21,62.56 | 36.83,62.56 36.63,62.56 | 36.55,62.63 36.37,62.63 D.U3.8
  Top 0.813: v33.48,67.17 33.59,67.29 D.C6.2 35.4,66.53 36.35,65.58 36.35,64.82 D.R8.1 | D.R8.1 36.61,64.65 | v38.05,61.01 38.05,61.72 37.34,62.43 | D.R8.1 36.47,64.59 36.47,62.71 36.55,62.63 36.63,62.56 | 37.21,62.56 36.83,62.56
  Bottom 0.254: D.U4.9 30.91,65.65 30.91,66.09
  Bottom 0.305: 30.68,65.86 30.91,66.09 D.U4.10
  Bottom 0.813: D.T1.D 38.11,62.22 38.11,61.07 v38.05,61.01 | v33.48,67.17 33.22,67.17 31.91,65.86 30.68,65.86
N$1  (via drill 0.35)
  Top 0.254: v14.03,67.38 v12.43,67.38
  Top 0.305: v14.04,67.38 v14.03,67.38
  Bottom 0.254: U$1.B7 12.74,66.93 v12.43,67.38 | v14.04,67.38 13.74,67.08 U$1.A7 U1.4
N$2
  Bottom 0.254: U1.3 13.24,63.42 U$1.A6 13.24,67.66 13.78,68.19 14.38,68.19 14.85,67.72 14.85,67.04 14.25,66.44 14.25,65.61 U$1.B6
N$3
  Bottom 0.254: U$1.A5 12.24,64.55 11.02,63.33 10.52,63.33 C.R6.2
N$4
  Bottom 0.254: U$1.B5 15.24,64.28 15.95,63.57 20,63.57 C.R5.2
N$5
  Bottom 0.305: C.F2.2 20.68,60.1
  Bottom 0.508: 22.47,60.1 JP1.3
  Bottom 0.61: 22.47,60.1 20.68,60.1
N$6
  Bottom 0.61: C.F1.2 20.77,66.94 21.48,66.94 22.21,66.21 22.21,65.7 JP1.1
N$7
  Bottom 0.254: U1.9 16.89,61.71 P1.TP
N$8
  Bottom 0.254: U1.5 U1.6
N$9
  Bottom 0.61: D.U1.VOUT 42.49,66.66 43.08,67.25 D.L2.1
N$10
  Bottom 0.305: 15.58,56.16 D.U2.VOUT 15.56,56.14 17.29,56.14 D.L1.1
N$11
  Bottom 0.305: D.U2.SHDN 12.8,58.1 11.21,58.1 C.R3.1
N$12
  Top 0.305: C.U1.IO4 5.72,66.58 C.J2.5
N$13
  Top 0.305: C.U1.IO17 5.18,64.58 C.J2.4
N$14
  Top 0.305: C.U1.IO18 4.64,62.58 C.J2.3
N$15
  Bottom 0.305: 41.58,64.72 41.58,68.85 41.33,69.09 37.74,69.09 37.38,69.45 D.ON/OFF/RESET.P$5 D.ON/OFF/RESET.P$3
  Bottom 0.356: D.R7.2 40.57,61.21 40.57,62.68 D.U1.SHDN 40.59,63.73 41.58,64.72
N$16  (via drill 0.35)
  Top 0.305: D.R5.1 39.77,55.06 v39.77,56
  Bottom 0.305: U$2.B5 39.67,56.1 v39.77,56
N$17  (via drill 0.35)
  Top 0.305: v42.67,56 42.67,54.9 D.R2.1
  Bottom 0.305: U$2.A5 v42.67,56
N$18  (via drill 0.35)
  Top 0.305: v31.97,63.49 31.97,63.52 30.52,64.96 D.R3.2
  Bottom 0.254: D.U4.6 30.99,64.08
  Bottom 0.305: 31.96,63.48 v31.97,63.49 31.97,63.66 31.55,64.09 D.U4.6
N$19
  Bottom 0.305: D.R9.2 31.98,52.84 29.59,55.23 29.59,64.56 30.12,65.09 D.U4.8
N$20
  Bottom 0.305: D.J2.5 28.59,68.04 33.93,68.04 34.36,67.62 34.36,66.82 32.83,65.29 32.83,61.93 D.T2.S
N$21
  Bottom 0.61: JP3.5 53.8,67.92 52.36,67.86 JP2.5
N$22
  Bottom 0.61: JP3.4 52.39,65.25 JP2.4
N$24
  Bottom 0.61: JP3.3 52.67,62.77 52.36,62.76 JP2.3
N$25
  Bottom 0.61: JP3.2 52.67,60.23 52.36,60.22 JP2.2
N$27
  Bottom 0.61: JP3.1 52.65,57.69 JP2.1
N$28
  Bottom 0.61: JP11.5 70.64,55.16 70.64,55.17 JP4.5
N$29
  Bottom 0.61: JP11.2 69.14,62.78 JP4.2
N$30
  Bottom 0.61: JP4.1 JP11.1
N$31
  Top 0.356: JP11.3 70.64,60.24
  Bottom 0.61: JP11.3 | JP4.3 JP11.3
N$32
  Top 0.305: L.R1.1 42.6,43.65 42.01,43.65 | L.R2.2 40.48,43.65 42.01,43.65 | 42.01,43.65 42.01,39.14 43.19,37.94 L.SW1.5
N$33
  Top 0.305: L.R2.1 40.21,45.38 39.09,45.38 | 39.09,45.38 37.92,45.38 L.R3.2 | 39.09,45.38 39.09,43.32 41.33,41.1 41.33,36.38 L.SW1.6
N$34
  Top 0.305: L.SW1.3 31.57,35.64 33.58,37.65 33.58,42.97 34.54,43.93 L.R4.2 L.R3.1
N$35
  Top 0.305: L.SW1.2 31.67,37.94 32.87,39.14 32.87,43.57 L.R5.2
N$36
  Top 0.254: 31.4,40.72 31.4,40.75 L.SW1.1
  Top 0.305: L.SW1.1 31.35,40.74 28.4,43.7 G.J1.5 | L.R6.1 31.39,30.35 29.92,31.83 29.92,39.24 31.4,40.72
N$37
  Top 0.305: L.R4.1 35.26,45.64 35.23,45.68 35.22,45.63 L.R5.1
N$38
  Bottom 0.305: JP5.5 4.4,43.52 5.99,41.93 5.99,40.31 8.48,37.82 K.R3.1
N$39
  Top 0.305: K.R6.2 8.68,45.59 JP5.4
  Bottom 0.305: JP5.4 4.4,40.73 8.35,36.78 12.06,36.78 K.R2.2 13.48,37.8 K.R4.1
N$40
  Bottom 0.305: K.R4.2 17.02,38.18 18.15,39.31 18.15,40.88 17.36,41.67 16.34,41.67 J1.5
N$41
  Bottom 0.305: J1.4 13.9,40.07 11.65,37.82 K.R3.2
N$42
  Bottom 0.305: K.R5.2 9.3,46.18 J1.3
N$43
  Bottom 0.305: J1.2 10.74,40.07 8.4,42.41 K.R1.2
N$44
  Top 0.305: B.U11A.7 6.99,12.87 B.R12A.2
N$45  (via drill 0.35)
  Top 0.305: B.U11A.6 8.7,15.91 v8.94,15.68 | v14.38,20.33 14.38,21.68 B.R11A.2
  Bottom 0.305: v8.94,15.68 9.43,15.68 14.08,20.33 v14.38,20.33
N$46
  Top 0.254: B.T11A.G 16.38,10.79 14.6,10.79 B.R13A.1 14.38,11.01 9.01,11.01 8.47,11.55 8.47,12.73 10.18,14.44 11.98,14.44 B.U11A.8
N$47
  Top 0.305: B.U11C.7 54.99,12.87 B.R12C.2
N$48
  Top 0.254: B.C11A.1 20.12,12.08 | B.C11B.1 44.12,12.08 | B.C11C.1 68.12,12.08
  Top 0.508: B.R14A.1 20.27,12.23 B.C11A.1 | B.R14B.1 44.27,12.23 B.C11B.1 | B.R14C.1 68.27,12.23 B.C11C.1
  Top 0.61: 20.12,12.08 22.45,12.08 B.J11.3 | B.C11A.1 19.54,12 18.28,10.74 B.T11A.S | 44.12,12.08 46.45,12.08 B.J4.3 | B.C11B.1 43.53,12 42.28,10.74 B.T11B.S | 68.12,12.08 70.45,12.08 B.J8.3 | B.C11C.1 67.53,12 66.28,10.74 B.T11C.S
  Bottom 0.61: B.J11.3 24.02,12.23 24.64,11.61 24.64,7.75 25.69,6.71 29.85,6.71 30.92,5.64 38.88,5.64 45.47,12.23 B.J4.3 48.02,12.23 48.62,11.64 48.62,7.78 49.69,6.71 53.85,6.71 54.92,5.64 62.88,5.64 69.47,12.23 B.J8.3
N$49
  Top 0.305: B.U11B.7 30.99,12.87 B.R12B.2
N$50  (via drill 0.35)
  Top 0.305: B.U11B.6 32.7,15.91 v32.94,15.68 | v38.38,20.33 38.38,21.68 B.R11B.2
  Bottom 0.305: v32.94,15.68 33.43,15.68 38.08,20.33 v38.38,20.33
N$51
  Top 0.254: B.T11B.G 40.38,10.79 38.6,10.79 B.R13B.1 38.38,11.01 33.01,11.01 32.47,11.55 32.47,12.73 34.18,14.44 35.98,14.44 B.U11B.8
N$52  (via drill 0.35)
  Top 0.305: B.U11C.6 56.7,15.91 v56.94,15.68 | v62.38,20.33 62.38,21.68 B.R11C.2
  Bottom 0.305: v56.94,15.68 57.43,15.68 62.08,20.33 v62.38,20.33
N$53
  Top 0.254: B.T11C.G 64.38,10.79 62.6,10.79 B.R13C.1 62.38,11.01 57.01,11.01 56.47,11.55 56.47,12.73 58.18,14.44 59.98,14.44 B.U11C.8
N$54
  Bottom 0.406: U$11.2 JP8.1
N$55
  Top 0.406: U$11.1 86.58,68.3 85.16,66.88 85.16,65.12 86.58,63.7 JP8.2
N$56
  Bottom 0.406: U$11.4 JP6.2
N$57
  Bottom 0.406: 79.12,69.62 U$11.5 78.73,69.77 78.73,68.12 78.06,67.45 78.06,65.19 78.78,64.48 78.78,63.68 JP6.3
N$58
  Bottom 0.406: U$11.3 84.34,69.69 84.34,68.17 84.94,67.58 84.94,65.25 84.29,64.6 84.29,63.75 JP6.1
N$59
  Bottom 0.305: N.R4.2 58.62,43.43 64.04,38.01 JP10.8 62.72,35.37 62.72,33.65 62.69,33.62 62.69,32.26 N.R1.2
N$60
  Bottom 0.305: N.R5.2 57.93,41.27 61.5,37.71 JP10.6 60.28,35.47 60.28,32.68 60.29,32.67 N.R2.2 60.18,32.31
N$61
  Bottom 0.305: N.R7.2 54.53,36.82 56.29,36.82 JP10.2
N$62
  Bottom 0.305: N.R4.1 52.82,43.43 JP9.5
N$63
  Bottom 0.305: N.R5.1 52.44,41.27 JP9.4
N$64
  Bottom 0.305: N.R6.1 52.75,39.12 JP9.3
N$65
  Bottom 0.305: N.R7.1 54.15,35.24 53.51,35.24 52.53,36.23 JP9.2
N$66
  Bottom 0.305: N.R8.1 53.46,31.81 52.4,32.88 JP9.1
N$67
  Bottom 0.305: N.R8.2 54.62,33.51 54.88,33.77 56.04,33.77 JP10.1
N$68
  Bottom 0.305: 56.53,39.12 N.R6.2 58.06,39.12 58.96,38.21 JP10.4 57.74,35.47 N.R3.2
N$69
  Bottom 0.254: U$12.2 86.58,22.25
  Bottom 0.406: 86.58,22.25 JP14.1
N$70
  Top 0.406: U$12.1 86.58,17.36 85.28,16.06 85.28,13.97 86.58,12.68 JP14.2
N$71
  Bottom 0.406: U$12.4 JP12.2
N$72
  Bottom 0.406: 79.12,21.62 U$12.5 78.58,21.62 78.58,20.17 78.06,19.66 78.06,16.95 78.78,16.23 78.78,15.18 JP12.3 79,15.04
N$73
  Bottom 0.406: U$12.3 84.4,21.64 84.4,20.15 84.94,19.61 84.94,16.97 84.27,16.31 84.27,15.23 JP12.1
PA1  (via drill 0.35)
  Top 0.305: B.U11A.13 10.81,21 v9.58,19.76
  Bottom 0.305: v9.58,19.76 4.49,19.76 B.J12.5
PA2  (via drill 0.35)
  Top 0.305: B.U11A.4 5.93,18.45 4.78,17.31 B.J12.4 | B.R11A.1 15.94,20.41 v15.93,20.4
  Bottom 0.305: v15.93,20.4 15.93,20.47 15.23,21.17 12.37,21.17 10,18.8 5.89,18.8 B.J12.4
PA3
  Top 0.305: D.R1.2 32.68,56.15 D.D1.1
  Bottom 0.254: 31.52,58.85 D.T2.D
  Bottom 0.305: 31.66,57.23 D.R6.1 | 31.9,55.45 D.D1.1 31.66,55.77 D.R6.1 | D.T2.D 31.66,59.23 D.R6.1
PA4
  Top 0.305: B.U11A.5 6.97,17.2 6.13,17.2 4.4,15.47 B.J12.3 4.4,14.12 5.72,12.8 5.72,12.18 B.R12A.1
PA5  (via drill 0.35)
  Top 0.305: B.U11B.13 34.81,21 v33.58,19.76
  Bottom 0.305: v33.58,19.76 28.49,19.76 B.J1.5
PA6
  Top 0.356: D.U3.1 30.71,62.61 29.96,62.61 29.72,62.85 29.72,63.45 28.4,64.77 D.J2.4
PA7
  Top 0.305: D.J2.3 28.4,62.51
  Top 0.356: 28.4,62.51 29.68,61.22 30.8,61.22 D.U3.2
PA8  (via drill 0.35)
  Top 0.305: B.U11B.4 29.93,18.45 28.78,17.31 B.J1.4 | B.R11B.1 39.94,20.41 v39.93,20.4
  Bottom 0.305: v39.93,20.4 39.93,20.47 39.23,21.17 36.37,21.17 34,18.8 29.89,18.8 B.J1.4
PA9
  Top 0.305: B.U11B.5 30.97,17.2 30.13,17.2 28.4,15.47 B.J1.3 28.4,14.12 29.72,12.8 29.72,12.18 B.R12B.1
PA10  (via drill 0.35)
  Top 0.305: B.U11C.13 58.81,21 v57.58,19.76
  Bottom 0.305: v57.58,19.76 52.49,19.76 B.J5.5
PA11  (via drill 0.35)
  Top 0.305: B.U11C.4 53.93,18.45 52.78,17.31 B.J5.4 | B.R11C.1 63.94,20.41 v63.93,20.4
  Bottom 0.305: v63.93,20.4 63.93,20.47 63.23,21.17 60.37,21.17 58,18.8 53.89,18.8 B.J5.4
PA12
  Top 0.305: B.U11C.5 54.97,17.2 54.13,17.2 52.4,15.47 B.J5.3 52.4,14.12 53.72,12.8 53.72,12.18 B.R12C.1
PROG  (via drill 0.35)
  Top 0.305: C.U1.IO0 7.32,67.58 7.33,67.59 7.86,67.59 8.12,67.33 8.12,62.45 8.87,61.74 v9.35,61.74
  Bottom 0.254: U1.23 11.52,62.18 9.89,62.18 9.48,61.74 v9.35,61.74
RESET  (via drill 0.35)
  Top 0.305: C.U1.EN 17.49,56.58 16.09,55.19 13.59,55.19 11.09,57.68 v11.09,59.29
  Bottom 0.254: U1.19 11.49,60.15 11.16,60.15
  Bottom 0.305: 11.16,60.15 11.16,59.36 v11.09,59.29
RX  (via drill 0.35)
  Top 0.305: C.U1.TXD0 7.01,57.56 7.98,57.56 v9.35,58.95
  Bottom 0.254: U1.20 11.52,60.69 10.95,60.69 9.35,59.09 v9.35,58.95
SCL
  Top 0.305: C.U1.IO22 6.04,56.58 5.68,56.93 5.31,57.28 4.81,57.28 C.J2.1
  Bottom 0.254: C.R1.1 4.73,57.41 C.J2.1
SCL1
  Top 0.356: D.U3.4 29.41,58.7 D.J2.1
SCL2
  Top 0.305: B.U11A.12 13.51,19.73 13.87,19.37 14.55,19.37 16.04,17.88 16.04,16.03 B.J14.3 16.02,13.47 10.95,13.47 9.71,12.23 B.J13.2 | B.U11B.12 37.51,19.73 37.87,19.37 38.55,19.37 40.04,17.88 40.04,16.03 B.J3.3 40.02,13.47 34.95,13.47 33.71,12.23 B.J2.2 | B.J12.1 5.14,9.69 9.51,5.32 24.72,5.32 26.39,7 26.39,9.26 26.82,9.69 B.J1.1 29.14,9.69 33.51,5.32 48.72,5.32 50.39,7 50.39,9.26 50.83,9.69 B.J5.1 | B.U11C.12 61.51,19.73 61.87,19.37 62.55,19.37 64.04,17.88 64.04,16.03 B.J7.3 64.02,13.47 58.95,13.47 57.71,12.23 B.J6.2
  Bottom 0.305: B.J12.1 6.94,12.23 B.J13.2 | B.J1.1 30.94,12.23 B.J2.2 | B.J5.1 54.94,12.23 B.J6.2
SDA
  Top 0.305: C.U1.IO21 5.1,59.58 C.J2.2
  Bottom 0.254: C.R2.1 4.6,60.43 C.J2.2
SDA1
  Top 0.305: 30.81,59.98 D.U3.3
  Top 0.356: D.U3.3 28.9,59.97 28.78,59.85 D.J2.2
SDA2
  Top 0.305: B.U11A.11 13.62,18.45 B.J14.2 | B.U11B.11 37.62,18.45 B.J3.2 | B.J12.2 5.83,10.8 5.83,9.88 9.9,5.8 24.17,5.8 24.58,6.21 24.58,10.24 26.57,12.23 B.J1.2 29.83,10.8 29.83,9.88 33.9,5.8 48.17,5.8 48.58,6.21 48.58,10.24 50.57,12.23 B.J5.2 | B.U11C.11 61.62,18.45 B.J7.2
  Bottom 0.305: B.J14.2 14.77,17.18 13.47,15.89 13.47,14.71 12.24,13.47 11.66,13.47 10.94,12.75 | B.J12.2 5.65,12.23 6.89,13.47 10.21,13.47 10.94,12.75 | 10.94,12.75 10.94,10.98 B.J13.3 | B.J3.2 38.77,17.18 37.48,15.89 37.48,14.71 36.24,13.47 35.66,13.47 34.94,12.75 | B.J1.2 29.65,12.23 30.89,13.47 34.21,13.47 34.94,12.75 | 34.94,12.75 34.94,10.98 B.J2.3 | B.J7.2 62.77,17.18 61.48,15.89 61.48,14.71 60.24,13.47 59.66,13.47 58.94,12.75 | B.J5.2 53.65,12.23 54.89,13.47 58.21,13.47 58.94,12.75 | 58.94,12.75 58.94,10.98 B.J6.3
STAT1
  Bottom 0.305: D.U4.3 34.59,65.09 34.01,64.5 34.01,62.37 34.01,62.36 34.01,58.53 34.37,58.17 34.37,55.6 D.D1.2
TX  (via drill 0.35)
  Top 0.305: C.U1.RXD0 7.66,58.59 9.3,60.23 v9.35,60.32
  Bottom 0.254: U1.21 10.29,61.21 9.4,60.32 v9.35,60.32
UPDI
  Top 0.305: B.U11A.10 11.96,16.95 10.93,16.95 10.54,16.57 10.54,15.73 7.89,13.08 7.89,8.69 10.14,6.44 21.89,6.44 B.J11.5
UPDI1
  Top 0.305: B.U11B.10 35.96,16.95 34.92,16.95 34.54,16.57 34.54,15.73 31.89,13.08 31.89,8.69 33.94,6.44 45.92,6.44 46,6.55 B.J4.5
UPDI2
  Top 0.305: B.U11C.10 59.96,16.95 58.92,16.95 58.54,16.57 58.54,15.73 55.89,13.08 55.89,8.69 58.14,6.44 69.89,6.44 B.J8.5
VBAT
  Bottom 0.61: B.J11.2 24.2,14.77 25.53,13.44 25.53,8.19 26.23,7.49 30.37,7.49 31.28,6.58 38.41,6.58 B.J4.2 48.2,14.77 49.53,13.44 49.53,8.19 50.23,7.49 54.37,7.49 55.28,6.58 62.41,6.58 B.J8.2
VBATF
  Top 0.813: D.J3.2 45.46,63.91 44.5,63.91 D.F2.2
VCC  (via drill 0.35)
  Top 0.406: 20,55.56 C.U1.3V3 | 21.45,56.13 v21.47,56.13 21.47,55.99 21.96,55.5 C.C1.1
  Top 0.508: C.U1.3V3 20.95,55.58 21.47,56.09 v21.47,56.13
  Bottom 0.254: 6.98,55.38 C.R1.2 | 7.01,58.72 C.R2.2
  Bottom 0.305: 21.54,55.19 21.24,55.49 16.69,55.49 16.39,55.19 8.44,55.19 7.93,55.71 | C.F2.1 20.38,57.71 20.7,57.38 | C.R1.2 7.93,55.71 | 7.93,55.71 7.89,55.74 7.89,58.04 7.57,58.37 7.38,58.37 C.R2.2
  Bottom 0.508: 21.54,55.19 21.54,54.78 C.C3.1 21.51,54.81 21.51,56.09 v21.47,56.13 20.7,56.89 20.7,57.38 | 20.07,58.21 C.F2.1
  Bottom 0.61: 20.07,58.21 19.52,58.21 18.24,59.49 D.L1.2 17.65,59.49 16.2,58.04 15.56,58.04 D.U2.BP
VCC1  (via drill 0.35)
  Top 0.254: D.C1.2 39.14,58.07 39.22,57.99
  Top 0.305: D.R4.1 37.21,53.23 36.92,53.23 36.14,54 v36.02,54 36.35,54.33 36.35,56.26 37.92,57.84 D.C1.2 39.01,58.07 | 38.32,65.89 v38.07,66.14
  Top 0.356: D.C1.2 37.88,58.11
  Top 0.61: D.C1.2 37.7,58.3 37.31,58.3 36.88,58.72 36.26,58.72 D.U3.5 | 38.99,65.89 v38.94,65.91 | 39.22,57.99 39.12,57.99
  Top 0.813: 38.99,65.89 39.19,65.7 39.19,58.09 37.95,58.09 D.C1.2 | D.F1.1 41.44,58.07 39.01,58.07 | v38.94,65.91 38.32,65.89
  Bottom 0.305: v36.02,54 35.97,53.95 31.84,53.95 30.36,55.43 30.36,61.36 D.T2.G
  Bottom 0.356: v38.94,65.91 38.94,65.89
  Bottom 0.61: D.L2.2 40.28,66.96 40.59,66.65 D.U1.BP | 39.81,68 D.L2.2 | D.C7.2 38.91,67.9 38.89,67.87 | 38.89,67.87 39.94,67.87 D.L2.2 | 38.81,67.79 38.89,67.87
  Bottom 0.813: 38.81,67.79 38.81,65.89 38.32,65.89 v38.07,66.14
VCC2
  Top 0.305: L.R6.2 42.9,30.35 45.3,32.75 45.3,35.21 46.32,36.23 G.J2.3
  Bottom 0.305: G.J2.3 46.09,35.72 L.C1.2
VCC3  (via drill 0.35)
  Top 0.305: K.R6.1 16.79,45.59 v17.25,45.14
  Bottom 0.305: K.C1.1 20.04,38.19 20.64,38.19 I.J3.3 | K.R2.1 17.54,36.58 19.13,38.16 19.41,38.16 K.C1.1 | v17.25,45.14 19.74,42.65 K.C1.1
VCC4  (via drill 0.35)
  Top 0.254: B.T11A.D 17.07,12.43 | B.J13.1 12.43,12.43
  Top 0.508: B.U11A.1 8.93,22.27 v9.27,21.92 | B.T11A.D 18.09,12.69 18.81,13.41 18.81,14.94 19.44,15.57 19.99,15.57 B.R14A.2
  Top 0.61: 17.07,12.43 12.43,12.43
  Bottom 0.356: 16.04,16.65 16.04,18.04
  Bottom 0.508: B.J13.1 B.J14.4 14.77,15.38 16.04,16.65 | v9.27,21.92 v9.28,21.93 15.93,21.93 16.89,20.96 16.89,18.89 16.04,18.04
VCC5  (via drill 0.35)
  Top 0.254: B.T11B.D 41.07,12.43 | B.J2.1 36.43,12.43
  Top 0.508: B.U11B.1 32.93,22.27 v33.27,21.92 | B.T11B.D 42.09,12.69 42.81,13.41 42.81,14.94 43.44,15.57 43.99,15.57 B.R14B.2
  Top 0.61: 41.07,12.43 36.43,12.43
  Bottom 0.356: 40.04,16.65 40.04,18.04
  Bottom 0.508: B.J2.1 B.J3.4 38.77,15.38 40.04,16.65 | v33.27,21.92 v33.28,21.93 39.92,21.93 40.89,20.96 40.89,18.89 40.04,18.04
VCC6  (via drill 0.35)
  Top 0.254: B.T11C.D 65.07,12.43 | B.J6.1 60.43,12.43
  Top 0.508: B.U11C.1 56.93,22.27 v57.27,21.92 | B.T11C.D 66.09,12.69 66.81,13.41 66.81,14.94 67.44,15.57 67.99,15.57 B.R14C.2
  Top 0.61: 65.07,12.43 60.43,12.43
  Bottom 0.356: 64.04,16.65 64.04,18.04
  Bottom 0.508: B.J6.1 B.J7.4 62.77,15.38 64.04,16.65 | v57.27,21.92 v57.28,21.93 63.92,21.93 64.89,20.96 64.89,18.89 64.04,18.04
VCC7
  Bottom 0.813: U$11.6 JP7.2
VCC8
  Bottom 0.305: N.R3.1 57.75,30.5 N.R2.1 N.R1.1 65.36,33.11 65.36,35.49 66.56,36.69 JP10.10
  Bottom 0.813: I.J1.3 68.56,36.23 N.C1.1 66.95,36.32 JP10.10
VCC9
  Bottom 0.813: U$12.6 JP13.2
VMOT  (via drill 0.35)
  Top 0.813: D.F2.1 44.22,62.21 v44.22,60.88 42.39,60.88 D.D2.K
  Bottom 0.305: D.U1.VIN 42.64,62.55
  Bottom 0.356: 42.69,62.51 42.5,62.7 D.U1.VIN
  Bottom 0.61: 42.62,61.21 D.R7.1
  Bottom 0.813: D.R7.1 42.4,60.99 42.4,60.22 41.95,59.76 39.94,59.76 39.48,60.22 39.48,63.66 39.08,64.06 D.T1.S | v44.22,60.88 44.09,61.01 42.82,61.01 42.64,61.19 42.64,62.55 | v44.22,60.88 42.96,60.88 42.62,61.21 | D.C2.2 44.12,60.98 v44.22,60.88
VUSB  (via drill 0.35)  (4 unrouted)
  Top 0.508: v17.83,64.98 17.83,64.94 v17.83,62.78 17.83,59.2 14.66,56.05 v14.17,56.05
  Top 0.61: v16.43,68.81 16.43,68.79 17.83,67.39 v17.83,64.98
  Bottom 0.254: 12.78,56.23 D.U2.VIN | C.F1.1 20.13,64.98 | 15.26,62.66 15.89,62.66
  Bottom 0.305: 11.04,64.67 11.04,64.68 U$1.A4B9 | D.U2.VIN 11.2,56.16 C.R3.2 | 15.2,62.28 15.2,62.51
  Bottom 0.508: 15.3,62.55 16.16,62.55 16.39,62.78 v17.83,62.78 | v14.17,56.05 14.1,56.12 12.88,56.12 D.U2.VIN
  Bottom 0.61: 17.84,64.99 v17.83,64.98 17.83,64.84 17.3,64.31 16.19,64.31 15.94,64.56 U$1.B4A9 | 11.04,64.84 11.04,64.67 11.04,64.57 10.76,64.29 7.01,64.29 C.C5.2 6.8,64.5 6.8,67.42 8.28,68.9 16.34,68.9 v16.43,68.81
  Bottom 0.813: 17.84,64.98 v17.83,64.98 20.13,64.98
VUSB1  (via drill 0.35)
  Top 0.813: D.J3.1 46.3,65.61 42.76,65.61 41.95,64.81 41.95,64.58 | 41.95,64.58 D.D2.A | v44.12,59.3 40.92,59.3 40.46,59.76 40.46,63.09 41.95,64.58
  Bottom 0.305: D.U4.2 35.38,65.6 | 35.33,66.09 D.U4.1 | D.U4.1 35.38,65.81 34.37,65.81 33.4,64.84 33.4,57.39 D.R6.2 | D.U4.2 35.63,65.84 | 35.38,65.8 35.38,65.79 | 35.38,65.79 35.38,65.6 | 35.38,65.6 D.U4.2 | D.U4.1 35.38,65.79
  Bottom 0.356: 36.65,62.13 D.C4.2
  Bottom 0.508: 38.97,57.52 38.97,58.5 | 38.98,58.78 43.73,58.78
  Bottom 0.61: 36.77,61.07 D.C4.2 36.67,60.92 | D.T1.G 37.18,64.57 | v44.12,59.3 43.86,59.3 | 38.97,58.91 38.97,58.76 | U$2.B4A9 38.97,58.5 38.97,58.76 | 38.97,58.76 38.98,58.78 | 43.73,58.78 43.86,58.64 43.87,58.63 U$2.A4B9
  Bottom 0.813: 36.7,60.8 D.C4.2 | 43.86,59.3 43.86,58.64 | 38.97,58.91 38.11,59.77 36.98,59.77 36.75,59.99 36.75,60.75 D.C4.2 | D.C4.2 36.84,61.05 36.84,63.67 37.18,64.01 D.T1.G 37.18,65.22 36.56,65.84 35.63,65.84 | v43.15,59.31 v44.12,59.31 v44.12,59.3
VUSB2
  Bottom 0.61: B.J11.1 24.17,17.31 26.39,15.09 26.39,8.69 26.79,8.29 30.93,8.29 31.73,7.49 37.85,7.49 45.02,14.67 45.02,15.51 46.6,17.09 B.J4.1 48.17,17.31 50.39,15.09 50.39,8.69 50.79,8.29 54.93,8.29 55.73,7.49 61.85,7.49 69.03,14.67 69.03,15.51 70.6,17.09 B.J8.1

## Text on the board
tPlace: + | − | power M4 | proto | M.4 | meteo / M.4 | connector M.4 | 5wSwitch M4
bPlace: main M.4 | GND | GND | GND | PA3 | PA3 | PA3 | PA6 | VUSB | PA6 | VUSB | PA6 | VUSB | PA7 | VBAT | PA7 | VBAT | PA7 | VBAT | SDA | 3V3 | SDA | 3V3 | SDA | 3V3 | SCL | GND | SCL | GND | SCL | GND | UPDI | UPDI | UPDI | adapter 414 M.4 | adapter 414 M.4 | adapter 414 M.4
tNames: Hugo M4